# EAGLE board vco-test-both-sides-3 (EAGLE 9.2.2)
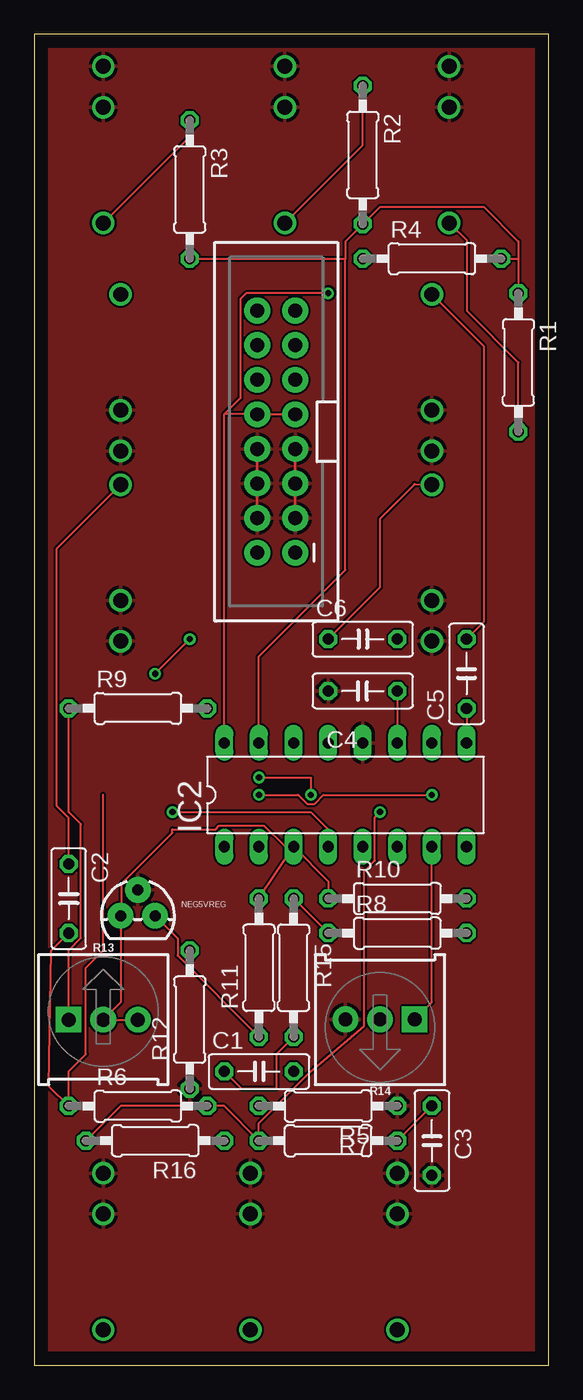
[diagram p0: board, top side]
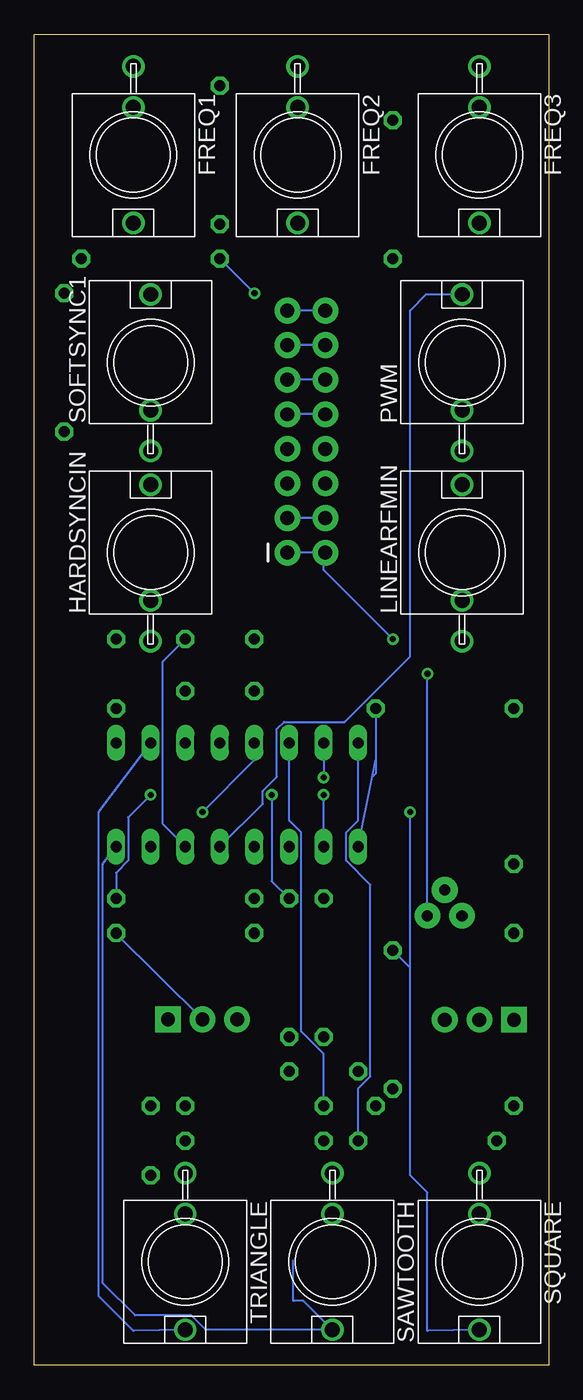
[diagram p1: board, bottom side, seen from below]

Size 37.77 x 97.78 mm. Coordinates in mm from the lower left corner, seen from the top.
Outline: 0,0 37.77,0 37.77,97.78 0,97.78 0,0
Copper layers (1*16): Top 0.035mm / dielectric 1.5mm / Bottom 0.035mm
Design rules "default": minimum track width 6mil, minimum drill 0.35mm, track to track 6mil, track to pad 6mil, pad to pad 6mil, via to via 6mil, smd to smd 6mil, copper to edge 40mil, drill to drill 6mil, minimum pad ring 10mil, minimum via ring 8mil, stop-mask expansion 4mil, vias tented up to drill 0mil, thermal gap 10mil

## Footprints (pad centres in the part's own frame; a part is rotated, then mirrored left to right if it is on the bottom)
C050-025X075 = drill 0.813 octagon: 1 -2.54,0; 2 2.54,0
WQP-PJ301M-12_JACK = drill 1.1: P$1 0,5; P$2 0,-3.5; P$3 0,-6.5
DIL16 = drill 0.813 long: 1 -8.89,-3.81; 2 -6.35,-3.81; 3 -3.81,-3.81; 4 -1.27,-3.81; 5 1.27,-3.81; 6 3.81,-3.81; 7 6.35,-3.81; 8 8.89,-3.81; 9 8.89,3.81; 10 6.35,3.81; 11 3.81,3.81; 12 1.27,3.81; 13 -1.27,3.81; 14 -3.81,3.81; 15 -6.35,3.81; 16 -8.89,3.81
2X8-SHROUDED_LOCK = drill 1.016 pad 1.88: 1 -1.397,8.89; 2 1.397,8.89; 3 -1.397,6.35; 4 1.397,6.35; 5 -1.397,3.81; 6 1.397,3.81; 7 -1.397,1.27; 8 1.397,1.27; 9 -1.397,-1.27; 10 1.397,-1.27; 11 -1.397,-3.81; 12 1.397,-3.81; 13 -1.397,-6.35; 14 1.397,-6.35; 15 -1.397,-8.89; 16 1.397,-8.89
TO-92 = drill 0.813 pad 1.88: 1 -1.27,0; 2 0,1.905; 3 1.27,0
0207/10 = drill 0.813 octagon: 1 -5.08,0; 2 5.08,0
TRIMPOT-PTH-3386U = drill 1.016 pad 1.88 square: 1 -2.54,-0.015 | drill 1.016 pad 1.88: 2 0,-0.015; 3 2.54,-0.015

## Placement (x,y rotation side)
C1  .01u  [C050-025X075]  16.51,21.59 0 top
C2  .1u  [C050-025X075]  2.54,34.29 270 top
C3  .01u  [C050-025X075]  29.21,16.51 270 top
C4  1000p  [C050-025X075]  24.13,49.53 180 top
C5  .001u  [C050-025X075]  31.75,50.8 90 top
C6  .001u  [C050-025X075]  24.13,53.34 0 top
FREQ1  WQP-PJ301M-12_JACK  [WQP-PJ301M-12_JACK]  30.48,88.9 180 bottom
FREQ2  WQP-PJ301M-12_JACK  [WQP-PJ301M-12_JACK]  18.41,88.9 180 bottom
FREQ3  WQP-PJ301M-12_JACK  [WQP-PJ301M-12_JACK]  5.08,88.9 180 bottom
HARDSYNCIN  WQP-PJ301M-12_JACK  [WQP-PJ301M-12_JACK]  29.21,59.69 0 bottom
IC2  CEM3340  [DIL16]  22.86,41.91 0 top
J3  [2X8-SHROUDED_LOCK]  17.78,68.58 180 top
LINEARFMIN  WQP-PJ301M-12_JACK  [WQP-PJ301M-12_JACK]  6.35,59.69 0 bottom
NEG5VREG  [TO-92]  7.62,33.02 0 top
PWM  WQP-PJ301M-12_JACK  [WQP-PJ301M-12_JACK]  6.35,73.66 0 bottom
R1  100K  [0207/10]  35.56,73.66 270 top
R2  100K  [0207/10]  24.13,88.9 270 top
R3  100K  [0207/10]  11.43,86.36 270 top
R4  360K  [0207/10]  29.21,81.28 0 top
R5  1.8K  [0207/10]  21.59,19.05 180 top
R6  1M  [0207/10]  7.62,19.05 0 top
R7  [0207/10]  21.59,16.51 0 top
R8  1M  [0207/10]  26.67,31.75 0 top
R9  24K  [0207/10]  7.62,48.26 0 top
R10  5.6K  [0207/10]  26.67,34.29 0 top
R11  820  [0207/10]  16.51,29.21 90 top
R12  10K  [0207/10]  11.43,25.4 90 top
R13  10k  [TRIMPOT-PTH-3386U]  5.08,25.4 0 top
R14  10k  [TRIMPOT-PTH-3386U]  25.4,25.4 180 top
R15  470  [0207/10]  19.05,29.21 270 top
R16  1.5M  [0207/10]  8.89,16.51 180 top
SAWTOOTH  WQP-PJ301M-12_JACK  [WQP-PJ301M-12_JACK]  15.88,7.62 180 bottom
SOFTSYNC1  WQP-PJ301M-12_JACK  [WQP-PJ301M-12_JACK]  29.21,73.66 0 bottom
SQUARE  WQP-PJ301M-12_JACK  [WQP-PJ301M-12_JACK]  5.08,7.62 180 bottom
TRIANGLE  WQP-PJ301M-12_JACK  [WQP-PJ301M-12_JACK]  26.67,7.62 180 bottom

## Library data of the parts
C1-C6 = rcl; SPICEPREFIX: C
FREQ1 FREQ3 HARDSYNCIN LINEARFMIN PWM SAWTOOTH SOFTSYNC1 SQUARE TRIANGLE = thonkiconn
FREQ2 = thonkiconn; SPICEPREFIX: U
IC2 = CEM
J3 = SparkFun-Connectors
NEG5VREG = SparkFun-IC-Power
R1-R12 R15 R16 = rcl; SPICEPREFIX: R
R13 R14 = SparkFun-Resistors; PROD_ID: RES-09730; SF_SKU: COM-09806

## Nets
+5V: J3.11 J3.12
+12V: IC2.16 J3.9 J3.10 R4.1 R16.1
-12V: J3.1 J3.2 NEG5VREG.3 R11.1
CV: J3.13 J3.14
GATE: J3.15 J3.16
GND: C3.2 C4.2 FREQ1.P$2 FREQ1.P$3 FREQ2.P$2 FREQ2.P$3 FREQ3.P$2 FREQ3.P$3 HARDSYNCIN.P$2 HARDSYNCIN.P$3 IC2.12 J3.3 J3.4 J3.5 J3.6 J3.7 J3.8 LINEARFMIN.P$2 LINEARFMIN.P$3 NEG5VREG.2 PWM.P$2 PWM.P$3 R5.1 R12.1 R14.3 SAWTOOTH.P$2 SAWTOOTH.P$3 SOFTSYNC1.P$2 SOFTSYNC1.P$3 SQUARE.P$2 SQUARE.P$3 TRIANGLE.P$2 TRIANGLE.P$3
N$1: IC2.2 R10.2
N$2: C1.1 R15.2
N$3: IC2.14 R5.2
N$4: IC2.13 R6.2 R7.1 R16.2
N$5: C2.2 R6.1
N$6: C3.1 R7.2
N$7: C4.1 IC2.11
N$8: IC2.1 R9.2
N$9: C5.1 IC2.9
N$10: R8.2 R14.2
N$11: R9.1 R13.1
N$12: IC2.3 NEG5VREG.1 R10.1 R11.2 R13.2 R13.3
N$13: IC2.7 R14.1
N$14: FREQ1.P$1 R1.2
N$15: C6.2 IC2.6
N$16: C6.1 HARDSYNCIN.P$1
N$18: IC2.4 R12.2 SQUARE.P$1
N$20: FREQ2.P$1 R2.1
N$21: IC2.15 R1.1 R2.2 R3.2 R4.2 R8.1 R15.1
N$22: FREQ3.P$1 R3.1
N$23: IC2.10 TRIANGLE.P$1
N$24: C2.1 LINEARFMIN.P$1
N$29: C5.2 SOFTSYNC1.P$1
N$31: IC2.8 SAWTOOTH.P$1
N$35: IC2.5 PWM.P$1

## Tracks (layer width: path | path; a pad name or v marks a point on that pad's centre or on a via)
+5V
  Bottom 0.152: J3.12 J3.11
+12V  (via drill 0.45)
  Top 0.152: 14.35,45.34 IC2.16 13.97,69.85 | J3.9 J3.10 13.97,69.85 | v21.59,78.74 15.57,78.74 15.15,78.32 15.15,71.03 13.97,69.85
  Bottom 0.152: J3.10 J3.9 | R16.1 13.97,20.33 13.08,21.22 13.08,35.29 14.86,37.07 14.86,39.13 13.97,40.02 IC2.16 | R4.1 v21.59,78.74
-12V  (via drill 0.45)
  Top 0.152: J3.1 19.05,59.69 | NEG5VREG.3 10.54,31.37 10.54,30.11 16.51,24.14 R11.1 | v8.89,50.8 v11.43,53.34
  Bottom 0.152: J3.2 16.51,59.69 | 16.51,59.69 J3.1 | NEG5VREG.3 v8.89,50.8 | v11.43,53.34 16.51,58.42 16.51,59.69
CV
  Bottom 0.152: J3.14 J3.13
GATE
  Bottom 0.152: J3.16 J3.15
GND
  Top 0.152: J3.3 J3.5 J3.7 | J3.4 J3.6 J3.8
  Bottom 0.152: FREQ1.P$2 30.82,92.74 | J3.4 J3.3 | J3.8 16.23,67.16
  pour Top: 0,97.79 38.1,97.79 38.1,0 0,0
N$1  (via drill 0.45)
  Top 0.152: v16.51,41.91 19.39,41.91 20.05,41.25 20.59,41.25 21.25,41.91 v29.21,41.91
  Bottom 0.152: IC2.2 v16.51,41.91 | v29.21,41.91 30.86,40.26 30.86,37.07 31.75,36.18 R10.2
N$2
  Top 0.152: R15.2 17.78,22.86 17.78,20.32 15.24,20.32 C1.1
N$3
  Bottom 0.152: R5.2 16.51,22.87 18.16,24.52 18.16,39.13 19.05,40.02 IC2.14
N$4  (via drill 0.45)
  Top 0.152: R16.2 6.35,19.05 R6.2 13.97,19.05 R7.1 16.51,17.79 19.94,21.22 20.32,21.59 24.23,24.94 24.23,36.28 25.02,37.07 25.02,40.26 v25.4,40.64
  Bottom 0.152: v25.4,40.64 21.59,44.45 IC2.13
N$5
  Top 0.152: C2.2 1.27,30.48 1.09,20.5 R6.1 2.54,21.59 3.81,22.86 3.81,29.21 5.08,30.48 5.08,41.91
N$6
  Top 0.152: C3.1 R7.2
N$7
  Top 0.152: C4.1 IC2.11
N$8
  Bottom 0.152: IC2.1 12.94,43.23 | 12.94,43.23 12.7,44.45 | R9.2 12.7,43.47 12.94,43.23
N$9
  Top 0.152: C5.1 IC2.9
N$10
  Bottom 0.152: R14.2 31.75,31.69 R8.2
N$11
  Top 0.152: 2.16,47.88 R9.1 2.54,40.64 3.43,39.75 3.43,31.38 2.54,30.49 R13.1
N$12
  Top 0.152: R13.3 7.61,25.39 R13.2 6.35,26.66 NEG5VREG.1 6.45,33.12 6.45,35.41 10.16,39.12 10.16,39.37 13.32,39.37 13.6,39.65 16.88,39.65 18.43,38.1 IC2.3 | R11.2 IC2.3 | IC2.3 21.59,35.56 R10.1
N$13
  Top 0.152: R14.1 29.21,26.67 IC2.7
N$14
  Top 0.152: FREQ1.P$1 31.79,82.59 31.79,77.43 35.56,73.66 R1.2
N$15
  Bottom 0.152: IC2.6 28.32,39.75 28.32,51.69 C6.2
N$16
  Top 0.152: HARDSYNCIN.P$1 27.94,64.73 25.4,62.19 25.4,57.15 C6.1
N$18  (via drill 0.45)
  Top 0.152: v10.16,40.64 20.32,40.64 21.59,39.37 IC2.4
  Bottom 0.152: SQUARE.P$1 8.89,2.54 8.89,12.7 10.16,13.97 10.16,29.21 | 10.16,29.21 R12.2 | 10.16,29.21 v10.16,40.64
N$20
  Top 0.152: FREQ2.P$1 24.13,89.61 R2.1
N$21  (via drill 0.45)
  Top 0.152: R8.1 R15.1 | v16.51,43.18 20.32,43.18 v20.32,41.91 | IC2.15 16.51,52.07 22.86,58.42 22.86,81.28 | R4.2 35.56,81.28 R1.1 35.56,82.55 33.02,85.09 25.4,85.09 R2.2 22.86,82.55 22.86,81.28 | R3.2 22.86,81.28
  Bottom 0.152: IC2.15 v16.51,43.18 | v20.32,41.91 20.32,35.56 R15.1
N$22
  Top 0.152: R3.1 11.43,90.25 FREQ3.P$1
N$23
  Bottom 0.152: TRIANGLE.P$1 30.48,2.54 33.02,5.08 33.02,40.64 IC2.10
N$24
  Top 0.152: C2.1 2.54,40.21 1.65,41.1 1.65,59.99 LINEARFMIN.P$1
N$29
  Top 0.152: 31.75,76.12 SOFTSYNC1.P$1 33.02,74.85 33.02,54.61 C5.2
N$31
  Bottom 0.152: 18.75,7.69 18.75,4.79 18.71,4.74 18,4.74 SAWTOOTH.P$1 25.18,2.62 26.23,3.67 30.34,3.67 32.72,6.04 32.72,36.83 IC2.8
N$35
  Bottom 0.152: IC2.5 20.98,41.25 20.98,42.18 19.94,43.22 19.94,46.75 19.42,47.27 14.96,47.27 10.16,52.07 10.16,77.47 8.97,78.66 PWM.P$1